# Altium PCB bootleg-alps.PcbDoc (part 3 of 3)
Units mm, origin at the board's own origin, x right, y up, seen from the top; angles counter-clockwise.
Board outline 284.8 x 94.3 mm, 2 copper layers (Component Side, Bottom Layer), stack 1.571 mm thick; 188 components, 146 nets, 677 pads, 266 vias.
Unrouted connection lines stored in the file: 68.
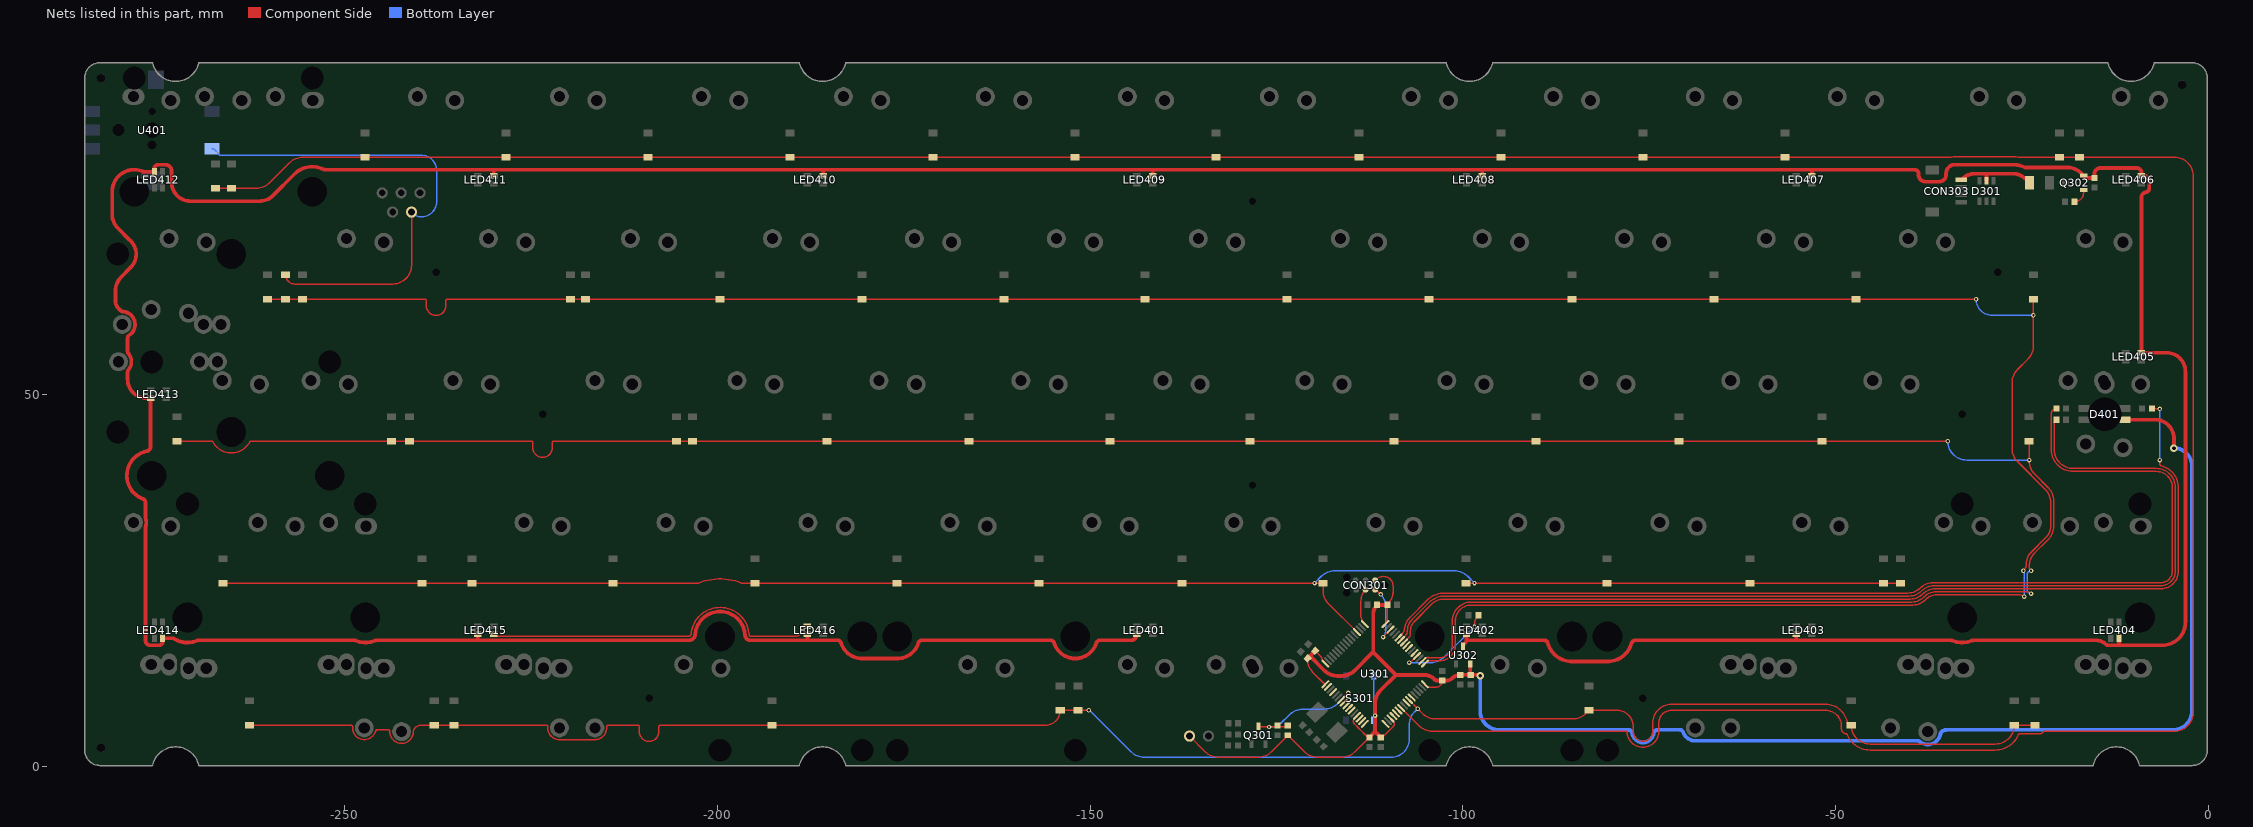
[diagram p3: the nets of this part, all layers, seen from the top]

## Via types
v1: diameter 0.6, hole 0.3, Component Side to Bottom Layer, tented both sides, 264 vias
v2: diameter 1, hole 0.5, Component Side to Bottom Layer, tented both sides, 2 vias

## Nets (pads, with @x,y where several pads share a name; then routed paths per layer and width w, separated by ;. In a path a pad name is that pad's centre, name@x,y a point inside that pad or via, vN(x,y) a via of type N, cw(c..) or ccw(c..) an arc to the next point about the centre after c; other vN are vias at no path point) (continued)
NetLED415_2: LED415.2 LED416.4 | length 48
  Component Side w0.203: LED415.2@-230.018,17.765 -229.77,17.517 -203.848,17.517 ccw(c-203.848,17.828) -203.545,17.755 ccw(c-203.743,17.803) -203.54,17.786 cw(c-199.649,17.47) -203.537,17.828 ; -203.397,18.562 ccw(c-199.649,17.47) -203.537,17.828 ; -197.38,20.646 ccw(c-199.649,17.47) -200.939,21.154 ccw(c-199.649,17.47) -203.46,18.318 ccw(c-199.649,17.47) -203.537,17.828 ; -197.379,20.646 cw(c-199.649,17.47) -196.292,19.461 cw(c-199.649,17.47) -195.755,17.729 ccw(c-195.552,17.743) -195.754,17.722 -195.753,17.714 cw(c-196.799,17.604) -195.752,17.699 ccw(c-195.549,17.717) -195.58,17.517 -189.467,17.517 ccw(c-189.467,18.25) -188.734,18.25 -188.734,18.558 cw(c-188.426,18.558) -188.426,18.865 LED416.4@-187.932,18.865
NetQ302_1: Q302.1 R301.1 | length 2.3
  Component Side w0.203: R301.1@-17.892,75.819 ccw(c-17.892,77.004) -16.707,77.004 Q302.1@-16.707,77.409
NRST: C317.1 Q301.3 R303.2 U301.7 | length 19
  Component Side w0.203: Q301.3@-127.396,5.442 ccw(c-127.288,5.442) -127.288,5.334 v1(-125.984,5.334) -123.652,5.334 ccw(c-123.652,5.527) R303.2@-123.459,5.527 ; U301.7@-116.321,8.946 v1(-115.361,9.906) U301.7@-116.321,8.946
  Bottom Layer w0.203: v1(-125.984,5.334) -125.603,5.334 ccw(c-125.603,7.023) -124.408,5.829 -123.355,6.882 cw(c-121.275,4.8) -121.698,7.713 cw(c-121.275,4.8) -121.275,7.743 -118.576,7.743 ccw(c-118.576,10.283) -116.78,8.487 v1(-115.361,9.906)
  other v1: -115.361,9.906
PA0: U301.14
PA1: U301.15
PA2: U301.16
PA3: U301.17
PA4: U301.20
PA5: U301.21
PA6: U301.22
PA7: D201.2 D202.2 D203.2 D204.2 D205.2 D206.2 D207.2 D208.2 D209.2 D210.2 D211.2 D212.2 D213.2 D214.2 D228.2 U301.23 | length 458
  Component Side w0.203: D228.2@-267.335,77.615 D214.2@-265.176,77.615 -261.892,77.615 ccw(c-261.892,80.155) -260.096,78.359 -257.419,81.036 cw(c-255.623,79.24) -255.623,81.78 D213.2@-247.269,81.78 -37.719,81.78 -34.503,81.78 ccw(c-34.503,81.983) -34.457,81.785 cw(c-33.945,79.592) -33.945,81.844 -26.228,81.844 cw(c-26.228,77.039) -25.461,81.783 ccw(c-25.429,81.983) -25.429,81.78 -18.669,81.78 -4.516,81.78 cw(c-4.516,79.24) -1.976,79.24 -1.976,7.314 cw(c-4.516,7.314) -4.516,4.774 -21.911,4.774 ccw(c-21.912,4.57) -22.073,4.695 cw(c-22.631,5.125) -22.631,4.42 -25.262,4.42 ccw(c-25.263,4.217) -25.451,4.295 cw(c-28.532,5.58) -25.581,4.018 cw(c-28.532,5.58) -27.174,2.53 cw(c-28.532,5.58) -28.532,2.242 -45.347,2.242 cw(c-45.347,5.58) -46.495,2.445 cw(c-45.347,5.58) -47.983,3.532 cw(c-45.347,5.58) -48.432,4.304 ccw(c-48.62,4.226) -48.59,4.428 cw(c-48.489,5.125) -49.194,5.125 -49.194,5.682 ccw(c-51.317,5.439) -49.195,5.694 ccw(c-51.317,5.439) -49.701,6.837 ccw(c-51.317,5.439) -51.317,7.576 -71.978,7.576 ccw(c-71.978,5.842) -73.093,7.169 ccw(c-71.978,5.842) -73.711,5.842 -73.711,4.715 cw(c-75.824,4.715) -73.769,4.224 cw(c-75.824,4.715) -73.769,4.223 ; U301.23@-108.26,7.885 -105.892,5.518 ccw(c-104.096,7.314) -104.096,4.774 -78.137,4.774 cw(c-78.135,4.57) -77.933,4.583 ccw(c-75.824,4.715) -75.824,2.602 ccw(c-75.824,4.715) -73.769,4.223 ; -73.94,3.759 ccw(c-75.824,4.715) -73.769,4.223
PA8: R402.2 U301.41 | length 133.1
  Component Side w0.203: U301.41@-107.906,16.653 -107.301,17.258 ccw(c-107.981,17.938) -107.02,17.938 -107.02,18.252 cw(c-105.3,18.252) -106.517,19.467 ; -106.516,19.468 -104.227,21.757 cw(c-102.431,19.961) -102.431,22.501 -39.937,22.501 ccw(c-39.937,24.848) -38.277,23.189 cw(c-36.617,21.529) -36.617,23.876 -6.35,23.876 ccw(c-6.35,26.239) -3.987,26.239 -3.987,37.487 ccw(c-6.931,37.487) -4.816,39.535 ; v1(-6.477,41.148) -6.477,40.77 ccw(c-5.033,40.77) -6.456,40.527 ccw(c-6.256,40.56) -6.3,40.362 cw(c-6.931,37.487) -4.816,39.535 ; v1(-6.477,48.006) R402.2@-7.196,48.006 ; R402.2@-7.196,48.006 ccw(c-7.536,47.055) R402.2@-7.536,48.065 ccw(c-7.477,48.065) -7.477,48.006 R402.2@-7.196,48.006
  Bottom Layer w0.203: v1(-6.477,41.148) v1(-6.477,48.006)
PA9: R401.1 U301.42 | length 142.8
  Component Side w0.203: U301.42@-108.26,17.007 -107.738,17.529 ; -107.738,17.529 ccw(c-108.499,18.29) -107.423,18.261 ccw(c-107.626,18.267) -107.423,18.263 ccw(c-107.626,18.267) -107.423,18.266 cw(c-105.3,18.252) -107.423,18.29 cw(c-105.3,18.252) -106.802,19.752 cw(c-105.3,18.252) -106.801,19.753 -106.457,20.097 -104.511,22.043 cw(c-102.431,19.961) -102.431,22.904 -40.104,22.904 ccw(c-40.104,25.251) -38.444,23.592 cw(c-36.784,21.932) -38.443,23.593 cw(c-36.784,21.932) -36.784,24.279 -6.35,24.279 ccw(c-6.35,26.239) -4.941,24.877 ccw(c-6.35,26.239) -4.391,26.239 -4.391,37.487 ccw(c-6.931,37.487) -6.931,40.027 -18.093,40.027 cw(c-18.093,42.567) -20.633,42.567 -20.633,46.267 cw(c-20.335,46.267) R401.1@-20.335,46.565
PA10: R403.2 U301.43 | length 144.2
  Component Side w0.203: U301.43@-108.613,17.36 -108.021,17.952 ccw(c-108.492,18.423) -107.826,18.423 ; -107.82,18.423 cw(c-105.3,18.252) -107.088,20.036 cw(c-105.3,18.252) -107.087,20.037 -104.796,22.328 cw(c-102.431,19.961) -102.431,23.307 -40.271,23.307 ccw(c-40.271,25.655) -38.611,23.995 cw(c-36.951,22.335) -38.61,23.996 cw(c-36.951,22.335) -36.951,24.682 -6.35,24.682 ccw(c-6.35,26.239) -5.17,25.224 ccw(c-6.35,26.239) -4.794,26.239 -4.794,37.487 ccw(c-6.931,37.487) -4.834,37.897 ccw(c-6.931,37.487) -6.931,39.624 -18.093,39.624 cw(c-18.093,42.567) -20.395,40.733 cw(c-18.093,42.567) -21.037,42.567 -21.037,47.363 cw(c-20.335,47.363) R403.2@-20.335,48.065
PA13/SWDIO: CON301.2 U301.46 | length 8.4
  Component Side w0.203: CON301.2@-111.76,23.749 cw(c-111.76,23.442) -111.543,23.659 v1(-110.998,23.114) ; v1(-110.696,17.399) U301.46@-109.674,18.421
  Bottom Layer w0.203: v1(-110.998,23.114) cw(c-112.531,21.581) -110.363,21.581 -110.363,18.203 cw(c-111.5,18.203) v1(-110.696,17.399)
PA14/SWCLK: CON301.4 U301.49 | length 4.9
  Component Side w0.203: U301.49@-113.139,19.128 cw(c-111.869,20.398) -113.665,20.398 -113.665,22.216 cw(c-111.497,22.216) CON301.4@-113.03,23.749
PB0: D257.2 D258.2 D259.2 D260.2 D261.2 D262.2 D263.2 D264.2 D265.2 D266.2 U301.26 | length 270.5
  Component Side w0.203: D266.2@-262.763,5.58 -249.365,5.58 cw(c-249.365,3.873) -249.128,5.563 cw(c-249.156,5.362) -248.954,5.345 ccw(c-247.388,5.215) -248.936,4.944 ccw(c-247.388,5.215) -245.873,4.795 cw(c-245.678,4.74) -245.677,4.944 -244.161,4.944 cw(c-244.162,4.74) -243.959,4.738 ccw(c-242.388,4.715) -242.703,3.175 ccw(c-242.388,4.715) -240.817,4.673 cw(c-240.614,4.667) -240.817,4.674 cw(c-240.614,4.667) -240.815,4.694 cw(c-239.806,4.563) -239.806,5.58 D265.2@-238,5.58 D264.2@-235.331,5.58 -222.968,5.58 cw(c-222.967,5.377) -222.765,5.358 ccw(c-221.199,5.215) -222.136,3.953 ccw(c-221.199,5.215) -221.169,3.644 ; -221.232,3.644 ccw(c-221.199,5.215) -221.169,3.644 ; -216.148,3.67 cw(c-216.437,5.215) -216.405,3.644 cw(c-216.437,5.215) -216.406,3.644 cw(c-216.437,5.215) -216.468,3.644 ccw(c-216.472,3.441) -216.473,3.644 -221.164,3.644 ccw(c-221.165,3.441) -221.167,3.644 ccw(c-221.165,3.441) -221.169,3.644 ; -215.707,3.823 cw(c-216.437,5.215) -216.148,3.67 ccw(c-216.437,5.215) -215.284,4.147 ccw(c-216.437,5.215) -214.871,5.083 ccw(c-216.437,5.215) -214.871,5.084 ccw(c-216.437,5.215) -214.872,5.358 cw(c-214.67,5.376) -214.676,5.579 cw(c-214.638,4.572) -214.638,5.58 -210.679,5.58 cw(c-210.679,5.377) -210.475,5.377 -210.475,4.715 ccw(c-209.169,4.715) -207.863,4.715 -207.863,5.377 cw(c-207.659,5.377) -207.659,5.58 D263.2@-192.659,5.58 -156,5.58 ccw(c-156,7.58) D262.2@-154,7.58 D261.2@-151.638,7.58 v1(-150.197,7.58) ; U301.26@-107.199,8.946 v1(-106.045,7.792) -105.412,7.159 ccw(c-103.616,8.955) -103.616,6.415 -85.276,6.415 ccw(c-85.276,8.955) -83.479,7.159 D260.2@-83.058,7.58 -79.334,7.58 cw(c-79.334,5.377) -77.13,5.377 -77.13,4.715 ccw(c-75.824,4.715) -74.518,4.715 -74.518,5.842 cw(c-71.978,5.842) -71.978,8.382 -51.317,8.382 cw(c-51.317,5.439) -49.386,7.66 ; -49.385,7.66 cw(c-51.317,5.439) -48.395,5.793 ccw(c-48.193,5.818) -48.239,5.62 ccw(c-47.879,7.231) D259.2@-47.879,5.58 ccw(c-45.347,5.58) -45.347,3.048 -28.532,3.048 ccw(c-28.532,5.58) D258.2@-26,5.58 D257.2@-23.241,5.58
  Bottom Layer w0.203: v1@-149.987,7.493 -144.508,2.014 ccw(c-142.712,3.81) -142.712,1.27 -124.968,1.27 -119.634,1.27 -109.601,1.27 ccw(c-109.601,3.683) -107.188,3.683 -107.188,5.597 cw(c-104.648,5.597) -106.444,7.393 v1(-106.045,7.792)
PB1: U301.27
PB12: D215.2 D216.2 D217.2 D218.2 D219.2 D220.2 D221.2 D222.2 D223.2 D224.2 D225.2 D226.2 D227.2 D242.2 D268.2 U301.33 | length 371.9
  Component Side w0.203: D242.2@-260.35,62.73 -239.26,62.73 cw(c-239.26,62.527) -239.056,62.527 -239.056,61.865 ccw(c-237.75,61.865) -236.444,61.865 -236.444,62.527 cw(c-236.24,62.527) -236.24,62.73 D226.2@-219.71,62.73 D225.2@-217.678,62.73 D224.2@-199.644,62.73 D223.2@-180.594,62.73 D222.2@-161.544,62.73 D221.2@-142.621,62.73 D220.2@-123.571,62.73 D219.2@-104.521,62.73 D218.2@-85.344,62.73 D217.2@-66.294,62.73 D216.2@-47.244,62.73 v1(-31.123,62.73) ; U301.33@-105.078,13.825 -104.689,14.214 -103.124,14.214 ccw(c-103.124,16.351) -101.694,14.762 ccw(c-101.83,14.914) -101.683,14.773 cw(c-101.174,14.286) -101.626,14.827 ccw(c-103.124,16.351) -101.429,15.05 ccw(c-103.124,16.351) -100.987,16.351 -100.987,19.558 cw(c-98.85,19.558) -100.514,20.899 cw(c-98.85,19.558) -98.85,21.695 -39.603,21.695 ccw(c-39.603,24.042) -37.943,22.382 cw(c-36.283,20.723) -37.942,22.383 ; -37.942,22.383 cw(c-36.285,20.726) -37.82,22.497 cw(c-37.687,22.343) -37.818,22.499 ccw(c-38.206,22.964) -37.813,22.503 ccw(c-38.206,22.964) -37.81,22.505 ; -37.81,22.506 ccw(c-38.074,22.81) -37.806,22.509 cw(c-37.671,22.357) -37.802,22.512 cw(c-37.66,22.367) -37.799,22.515 ccw(c-38.074,22.81) -37.787,22.526 cw(c-36.474,21.21) -37.77,22.543 cw(c-36.456,21.166) -36.456,23.07 -25.305,23.07 cw(c-25.305,22.278) -24.746,22.838 v1(-24.66,22.838) ; v1(-24.765,26.289) ccw(c-25.631,27.155) -24.406,27.155 cw(c-22.108,27.155) -23.733,28.78 -21.73,30.783 ccw(c-23.241,32.294) -21.104,32.294 -21.104,35.419 ccw(c-23.644,35.419) -21.848,37.215 -25.545,40.912 cw(c-23.749,42.708) -26.289,42.708 -26.289,51.526 cw(c-23.749,51.526) -25.545,53.322 -24.175,54.692 ccw(c-25.971,56.488) -23.431,56.488 D215.2@-23.431,62.73
  Bottom Layer w0.203: v1(-31.123,62.73) ccw(c-28.972,62.73) -28.972,60.579 v1@-23.495,60.579 ; v1(-24.765,26.289) -24.765,26.182 -24.66,26.077 v1(-24.66,22.838)
  other v1: -23.431,60.579
PB13: D229.2 D230.2 D231.2 D232.2 D233.2 D234.2 D235.2 D236.2 D237.2 D238.2 D239.2 D240.2 D241.2 D256.2 U301.34 | length 365.5
  Component Side w0.203: D256.2@-272.542,43.68 -267.867,43.68 cw(c-267.866,43.477) -267.688,43.574 ccw(c-265.225,44.907) -262.762,43.574 cw(c-262.584,43.477) -262.583,43.68 -224.972,43.68 cw(c-224.972,43.477) -224.768,43.477 -224.768,42.815 ccw(c-223.462,42.815) -222.156,42.815 -222.156,43.477 cw(c-221.952,43.477) -221.952,43.68 D237.2@-185.293,43.68 D236.2@-166.243,43.68 D235.2@-147.32,43.68 D234.2@-128.524,43.68 D233.2@-109.22,43.68 D232.2@-90.17,43.68 D231.2@-70.993,43.68 D230.2@-51.816,43.68 v1@-34.925,43.68 ; U301.34@-105.431,14.178 ccw(c-105.448,14.381) -105.4,14.183 ccw(c-105.448,14.381) -105.304,14.238 -105.009,14.532 cw(c-104.689,14.214) -104.519,14.632 ccw(c-104.442,14.82) -104.442,14.617 -104.272,14.617 -103.124,14.617 ccw(c-103.124,16.351) -102.67,14.677 ccw(c-103.124,16.351) -101.975,15.052 ccw(c-102.109,15.205) -101.965,15.062 cw(c-101.174,14.286) -101.899,15.124 ccw(c-103.124,16.351) -101.749,15.295 ccw(c-103.124,16.351) -101.39,16.351 -101.39,19.558 cw(c-98.85,19.558) -98.85,22.098 -39.77,22.098 ccw(c-39.77,24.445) -38.11,22.785 ccw(c-38.206,22.964) -38.074,22.81 cw(c-36.474,21.21) -36.474,23.473 -24.309,23.473 cw(c-24.309,22.681) v1(-23.749,23.241) ; D229.2@-24.003,43.68 -24.003,41.057 ccw(c-21.463,41.057) -23.259,39.261 -21.445,37.447 cw(c-23.241,35.651) -20.701,35.651 -20.701,32.294 cw(c-23.241,32.294) -21.445,30.498 -23.269,28.674 ccw(c-21.498,26.902) -24.003,26.902 ccw(c-23.136,26.902) v1(-23.749,26.289)
  Bottom Layer w0.203: v1(-34.925,43.688) ccw(c-32.385,43.688) -32.385,41.148 v1(-24.003,41.148) ; v1(-23.749,23.241) cw(c-23.749,23.749) -24.257,23.749 -24.257,25.781 cw(c-23.749,25.781) v1(-23.749,26.289)
PB15: R306.2 U301.36 | length 13.7
  Component Side w0.203: v1(-107.188,13.97) -107.112,14.046 -106.978,14.046 U301.36@-106.138,14.886 ; v1(-98.425,18.796) -98.425,19.057 cw(c-96.639,19.057) R306.2@-97.902,20.32
  Bottom Layer w0.203: v1(-107.188,13.97) -104.303,13.97 ccw(c-104.303,16.51) -102.507,14.714 v1(-98.425,18.796)
PC0: U301.8
PC1: U301.9
PC2: U301.10
PC3: U301.11
PC5: U301.25
PC6: U301.37
PC8: U301.39
PC9: U301.40
PC11: D243.2 D244.2 D245.2 D246.2 D247.2 D248.2 D249.2 D250.2 D251.2 D252.2 D253.2 D254.2 D255.2 D267.2 U301.52 | length 237
  Component Side w0.203: D255.2@-266.327,24.63 D254.2@-232.918,24.63 D253.2@-213.995,24.63 -202.617,24.63 ccw(c-202.617,24.833) -202.541,24.645 cw(c-199.649,17.47) -196.758,24.645 ccw(c-196.682,24.833) -196.682,24.63 D252.2@-194.945,24.63 D251.2@-175.895,24.63 D250.2@-156.845,24.63 D249.2@-137.668,24.63 D248.2@-118.745,24.63 -118.745,23.665 ccw(c-116.205,23.665) -118.001,21.869 U301.52@-114.2,18.067 ; D247.2@-99.568,24.63 D246.2@-80.645,24.63 D245.2@-61.468,24.63 D243.2@-43.561,24.63 D244.2@-41.275,24.63
  Bottom Layer w0.203: v1(-119.888,24.638) -118.981,25.545 cw(c-117.185,23.749) -117.185,26.289 -101.128,26.289 cw(c-101.128,23.749) -99.332,25.545 v1(-98.425,24.638)
PC13: U301.2
PC15: U301.4
RAW: CON303.1 D301.5 F301.2 | length 10.8
  Component Side w0.508: CON303.1@-33.125,78.75 -33.04,78.835 cw(c-31.244,77.039) -31.244,79.579 -29.591,79.579 ; D301.5@-29.718,78.625 -29.718,79.452 cw(c-29.591,79.452) -29.591,79.579 ; F301.2@-23.956,78.359 -24.432,78.835 ccw(c-26.228,77.039) -26.228,79.579 -29.591,79.579
ROT_SW_A1: CON403.1 D268.1 U401.1 | length 67.1
  Component Side w0.203: D268.1@-257.937,66 ccw(c-256.707,66) -256.707,64.77 -243.586,64.77 ccw(c-243.586,67.31) -241.046,67.31 CON403.1@-241.046,74.422
  Bottom Layer w0.203: U401.1@-267.844,82.915 -267.594,82.915 -266.946,82.267 -266.946,82.183 -266.827,82.064 -239.776,82.064 cw(c-239.776,79.927) -237.872,80.896 cw(c-239.776,79.927) -237.639,79.927 -237.639,75.91 cw(c-239.776,75.91) -238.146,74.528 cw(c-239.776,75.91) -239.656,73.777 cw(c-239.656,75.577) CON403.1@-240.928,74.304 ; CON403.1@-241.046,74.422 CON403.1@-240.928,74.304 ; CON403.1@-240.733,74.109 CON403.1@-240.928,74.304
VCC3V3: C301.2 C302.2 C303.2 C304.2 C305.2 C306.2 C311.2 C312.2 CON301.1 CON302.2 D401.4 R302.1 R303.1 S301.1 U301.1 U301.13 U301.19 U301.32 U301.48 U301.64 U302.2 | length 260.5
  Component Side w0.203: CON302.2@-136.667,4.115 -134.566,2.014 ccw(c-132.77,3.81) -132.77,1.27 -127.468,1.27 ccw(c-127.468,3.81) -125.672,2.014 R303.1@-123.459,4.227 -121.246,2.014 ccw(c-119.45,3.81) -119.45,1.27 -116.256,1.27 ccw(c-116.256,3.81) -114.46,2.014 C301.2@-112.522,3.952 cw(c-112.522,4.477) -112.894,4.106 -113.018,4.23 -113.802,5.015 ccw(c-113.947,4.872) -113.817,5.028 cw(c-113.528,5.375) -113.875,5.086 ccw(c-114.031,4.956) -113.888,5.1 -114.022,5.234 -114.156,5.368 ; C303.2@-120.825,14.526 -120.825,14.414 ccw(c-118.285,14.414) -120.523,13.211 ccw(c-120.344,13.307) -120.492,13.169 cw(c-122.013,11.755) -120.181,12.733 ccw(c-120.002,12.828) -120.152,12.691 ccw(c-118.285,14.414) -120.081,12.618 -118.594,11.13 ccw(c-118.442,11.282) U301.1@-118.442,11.067 ; C304.2@-119.809,15.542 -119.468,15.201 -118.989,14.722 cw(c-119.132,14.578) -118.929,14.575 ccw(c-118.478,14.567) -118.797,14.248 -118.497,13.948 cw(c-118.64,13.803) U301.64@-118.442,13.851 ; -114.228,5.44 ccw(c-113.881,5.728) -114.17,5.381 cw(c-114.3,5.225) -114.157,5.369 ; -114.229,5.44 ccw(c-114.385,5.31) -114.24,5.453 ccw(c-114.385,5.31) -114.241,5.454 -114.517,5.73 cw(c-114.235,6.082) -114.554,6.401 -114.259,6.697 ccw(c-114.402,6.841) U301.13@-114.2,6.825 ; CON301.1@-111.76,25.019 -111.701,25.078 cw(c-110.617,23.994) -110.617,25.527 cw(c-110.617,24.257) -109.347,24.257 -109.347,23.546 cw(c-111.887,23.546) -110.091,21.75 R302.1@-110.124,21.717 -110.124,19.749 cw(c-111.002,19.749) U301.48@-110.381,19.128 ; C306.2@-110.998,3.952 ccw(c-110.998,4.482) -110.623,4.107 -110.492,4.238 -109.874,4.856 -109.705,5.026 ; -109.704,5.026 cw(c-109.561,4.883) -109.695,5.035 ccw(c-109.992,5.375) -109.653,5.077 cw(c-109.5,4.943) -109.643,5.087 ; U301.19@-109.674,6.471 ccw(c-109.471,6.487) -109.615,6.344 -109.319,6.048 cw(c-109.639,5.728) -109.295,5.435 cw(c-109.639,5.728) -109.341,5.389 ccw(c-109.207,5.236) -109.351,5.38 -109.497,5.233 -109.643,5.087 ; U301.32@-105.078,11.067 ccw(c-104.875,11.084) -105.019,10.94 -104.806,10.727 ccw(c-104.662,10.871) -104.679,10.668 -103.617,10.668 ccw(c-103.617,11.542) C305.2@-102.743,11.542
  Component Side w0.508: C304.2@-119.809,15.542 -120.508,14.844 -118.6,12.936 ccw(c-116.804,14.732) -116.804,12.192 -116.257,12.192 ccw(c-116.257,14.732) -114.461,12.936 -112.022,15.375 ; C301.2@-112.351,4.123 -111.76,4.714 ; C306.2@-110.998,3.952 -111.023,3.952 -111.169,4.098 -111.169,4.123 -111.76,4.714 ; R302.1@-110.124,21.717 C312.2@-111.491,21.717 ccw(c-110.209,20.435) -111.92,21.034 ccw(c-110.209,20.435) -112.022,20.435 -112.022,15.375 ; -101.389,11.895 cw(c-102.242,12.749) -102.052,11.557 cw(c-102.242,12.749) -102.242,11.542 C305.2@-102.743,11.542 -103.245,11.542 cw(c-103.245,12.46) -103.894,11.811 ccw(c-105.121,10.585) -105.121,12.319 -108.966,12.319 ; -101.388,11.896 cw(c-100.33,10.837) -100.948,12.201 cw(c-100.33,10.837) C302.2@-100.33,12.334 C311.2@-98.933,12.334 ; U302.2@-98.999,13.786 -98.999,12.4 C311.2@-98.933,12.334 ; v2(-97.663,12.192) ccw(c-98.006,11.849) -98.006,12.334 C311.2@-98.933,12.334 ; D401.4@-11.125,46.565 -7.112,46.565 cw(c-7.112,44.025) -4.572,44.025 v2(-4.572,42.75) ; -112.022,15.375 -108.966,12.319 ; -111.76,4.714 v1(-111.76,6.858) -111.76,8.473 cw(c-109.22,8.473) -111.016,10.269 -108.966,12.319
  Bottom Layer w0.203: S301.1@-111.917,6.215 S301.1@-111.917,12.215
  Bottom Layer w0.508: v2(-97.663,12.192) -97.663,7.493 ccw(c-95.123,7.493) -95.123,4.953 -77.774,4.953 cw(c-77.772,4.445) -77.269,4.515 ccw(c-75.824,4.715) -74.379,4.515 cw(c-73.876,4.445) -73.874,4.953 -70.896,4.953 cw(c-70.894,4.445) -70.893,4.953 cw(c-70.894,4.445) -70.418,4.62 ccw(c-68.799,5.215) -68.773,3.491 ; -68.833,3.491 ccw(c-68.799,5.215) -68.773,3.491 ; v2(-4.572,42.75) cw(c-4.572,40.337) -2.159,40.337 -2.159,7.493 cw(c-4.699,7.493) -4.699,4.953 -34.935,4.953 ccw(c-34.935,3.386) -35.622,4.795 ccw(c-35.4,4.337) -35.901,4.423 cw(c-37.6,4.715) -36.502,3.386 cw(c-37.6,4.715) -38.688,3.377 ccw(c-39.008,2.983) -39.007,3.491 -42.569,3.491 ccw(c-42.57,2.983) -42.577,3.491 cw(c-42.6,5.215) -42.624,3.491 ccw(c-42.63,2.983) -42.629,3.491 -64.005,3.491 ccw(c-64.007,2.983) -64.012,3.491 ccw(c-64.007,2.983) -64.014,3.491 cw(c-64.037,5.215) -64.064,3.491 ccw(c-64.071,2.983) -64.065,3.491 ccw(c-64.071,2.983) -64.071,3.491 -68.765,3.491 ccw(c-68.765,2.983) -68.771,3.491 ccw(c-68.765,2.983) -68.773,3.491
VCC5V: C310.2 LED401.1 LED402.1 LED403.1 LED404.1 LED405.1 LED406.1 LED407.1 LED408.1 LED409.1 LED410.1 LED411.1 LED412.1 LED413.1 LED414.1 LED415.1 LED416.1 Q302.2 U302.3 | length 696.5
  Component Side w0.5: -272.429,16.925 cw(c-271.118,20.01) -272.431,16.926 cw(c-271.118,20.01) -272.904,17.173 ccw(c-273.17,16.75) -273.164,17.25 LED414.1@-274.449,17.25 -274.449,16.775 cw(c-274.924,16.775) -274.924,16.3 -276.098,16.3 cw(c-276.098,16.954) -276.752,16.954 -276.752,24.675 -276.752,32.04 cw(c-276.252,32.04) -276.724,32.203 ccw(c-278.35,32.765) -276.724,33.327 cw(c-276.252,33.49) -276.752,33.49 -276.752,35.456 ccw(c-277.252,35.457) -277.075,35.925 cw(c-275.888,39.06) -277.437,42.033 cw(c-275.888,39.06) -276.688,42.315 cw(c-275.888,39.06) -276.687,42.315 cw(c-275.888,39.06) -276.515,42.353 ccw(c-276.608,42.844) -276.29,42.459 ccw(c-276.688,42.94) -276.063,42.94 LED413.1@-276.063,49.45 -276.606,49.45 cw(c-276.606,51.99) -279.146,51.99 -279.146,52.936 cw(c-278.646,52.936) -279.032,53.253 ccw(c-280.361,54.345) -279.032,55.437 cw(c-278.646,55.754) -279.146,55.754 -279.146,57.487 cw(c-278.646,57.487) -278.92,57.906 ccw(c-279.861,59.345) -279.061,60.868 ccw(c-279.861,59.345) -279.748,61.061 cw(c-279.715,61.56) -279.988,61.141 cw(c-279.061,62.575) -280.768,62.575 -280.768,63.874 cw(c-278.228,63.874) -280.024,65.67 -278.681,67.062 ccw(c-280.465,68.783) -278.032,69.257 ccw(c-280.465,68.783) -278.873,70.683 -280.461,72.271 cw(c-278.665,74.067) -281.205,74.067 -281.205,77.1 ccw(c-281.705,77.101) -281.205,77.108 ccw(c-281.705,77.101) -281.205,77.11 cw(c-278.257,77.16) -277.066,79.858 ccw(c-276.864,80.315) -276.864,79.815 LED412.1@-275.548,79.815 -275.548,80.299 cw(c-275.082,80.299) -275.082,80.765 -274.066,80.765 cw(c-274.066,79.944) -273.245,79.944 -273.245,78.43 ccw(c-270.705,78.43) -270.705,75.89 -261.443,75.89 ccw(c-261.443,78.43) -259.647,76.634 -256.781,79.5 ccw(c-257.134,79.854) -256.778,79.504 ccw(c-257.134,79.854) -256.777,79.505 cw(c-254.381,77.16) -255.923,80.136 cw(c-254.381,77.16) -255.922,80.137 cw(c-254.381,77.16) -252.88,80.157 ; -272.429,16.925 ccw(c-271.118,20.01) -272.067,16.795 -272.063,16.794 ccw(c-271.118,20.01) -269.807,16.925 cw(c-269.611,16.465) -269.609,16.965 -248.751,16.965 cw(c-248.749,16.465) -248.553,16.925 ccw(c-247.242,20.01) -245.931,16.925 cw(c-245.735,16.465) -245.733,16.965 -232.028,16.965 ; -252.222,80.1 -251.714,80.1 -231.013,80.1 ; -252.222,80.104 -252.656,80.104 cw(c-252.656,80.604) -252.873,80.154 cw(c-252.656,80.604) -252.878,80.156 cw(c-252.656,80.604) -252.88,80.157 ; LED415.1@-232.148,17.765 -232.148,17.014 ccw(c-232.028,17.134) -232.028,16.965 ; LED411.1@-230.018,79.3 -230.018,80.1 ; -196.358,18.104 cw(c-199.649,17.47) -196.305,17.69 ; -196.358,18.104 ccw(c-199.649,17.47) -198.293,20.535 ccw(c-199.649,17.47) -202.201,19.643 ccw(c-199.649,17.47) -202.903,18.276 ccw(c-199.649,17.47) -202.99,17.745 cw(c-203.743,17.803) -202.99,17.744 cw(c-203.743,17.803) -202.991,17.74 cw(c-203.743,17.803) -203.01,17.623 cw(c-203.848,17.828) -203.848,16.965 -232.028,16.965 ; -196.305,17.689 ccw(c-195.552,17.743) -196.303,17.67 ccw(c-195.552,17.743) -196.303,17.667 -196.302,17.657 cw(c-196.799,17.605) -196.301,17.65 ccw(c-195.549,17.717) -196.301,17.647 ccw(c-195.549,17.717) -195.664,16.971 ccw(c-195.58,17.517) -195.58,16.965 -187.902,16.965 ; LED416.1@-187.932,17.765 -187.932,17.036 ccw(c-187.831,17.036) -187.902,16.965 ; LED410.1@-185.802,79.3 -185.802,80.081 ; LED401.1@-143.715,17.765 cw(c-144.515,17.765) -144.515,16.965 -148.692,16.965 ccw(c-148.694,16.465) -149.172,16.611 cw(c-151.993,17.47) -154.814,16.611 ccw(c-155.292,16.465) -155.294,16.965 -172.568,16.965 ccw(c-172.57,16.465) -173.048,16.611 cw(c-175.869,17.47) -176.007,14.524 ccw(c-176.053,13.622) -176.09,14.525 cw(c-176.129,15.431) -176.129,14.524 -180.45,14.524 ccw(c-180.452,14.024) -180.472,14.524 cw(c-180.589,17.47) -183.41,16.611 ccw(c-183.889,16.465) -183.89,16.965 -186.563,16.965 -187.902,16.965 ; LED409.1@-141.585,79.3 -141.585,80.081 ; U302.3@-99.949,16.186 -99.949,16.411 -99.924,16.436 U302.3@-99.791,16.436 ; U302.3@-99.79,16.436 ccw(c-100.498,17.143) -99.498,17.143 ; LED402.1@-99.498,17.765 -99.498,17.143 ; LED408.1@-97.368,79.3 -97.368,80.081 ; LED403.1@-55.282,17.765 cw(c-55.282,17.728) -55.245,17.728 -55.245,16.965 ; LED407.1@-53.152,79.3 -53.152,80.081 ; -35.141,79.592 cw(c-33.945,79.592) -33.945,80.788 -26.228,80.788 cw(c-26.228,77.039) -24.669,80.448 ccw(c-24.461,80.903) -24.461,80.403 -21.971,80.403 -18.853,80.403 cw(c-18.853,77.863) -17.057,79.659 Q302.2@-16.707,79.309 ccw(c-16.407,79.309) -16.407,79.009 C310.2@-15.24,79.009 -15.24,79.544 cw(c-14.451,79.544) -14.451,80.333 -9.568,80.333 cw(c-9.568,79.7) -8.935,79.7 LED406.1@-8.935,79.3 -8.584,79.3 cw(c-8.584,78.59) -7.874,78.59 -7.874,77.665 cw(c-8.493,77.665) -8.267,77.089 ; -13.718,16.431 ccw(c-13.4,16.75) -13.4,16.3 -11.95,16.3 ; -13.718,16.432 ccw(c-15.006,15.143) -15.006,16.965 -28.575,16.965 -31.487,16.965 ccw(c-31.487,16.465) -31.682,16.925 cw(c-32.994,20.01) -34.306,16.925 ccw(c-34.501,16.465) -34.501,16.965 -55.245,16.965 ; LED404.1@-11.95,17.25 -11.95,16.3 ; -252.88,80.157 ccw(c-254.381,77.16) -253.735,80.449 cw(c-254.381,77.16) -252.88,80.157 ; -99.498,17.143 -99.498,16.965 -89.078,16.965 cw(c-89.078,16.42) -88.955,16.951 cw(c-89.068,16.464) -88.586,16.596 ccw(c-85.349,17.47) -87.893,15.286 ccw(c-85.349,17.47) -85.194,14.122 cw(c-85.171,13.622) -85.169,14.122 -80.77,14.122 cw(c-80.768,13.622) -80.745,14.122 ccw(c-80.59,17.47) -80.434,14.122 ccw(c-80.59,17.47) -80.432,14.122 ccw(c-80.59,17.47) -78.976,14.532 ccw(c-80.59,17.47) -78.146,15.175 ccw(c-80.59,17.47) -77.361,16.568 cw(c-76.88,16.433) -77.361,16.57 cw(c-76.88,16.433) -77.169,16.841 cw(c-76.781,16.296) -76.781,16.965 -55.245,16.965 ; -11.95,16.3 -6.124,16.3 ccw(c-6.124,19.392) -4.048,17.101 ccw(c-6.124,19.392) -3.033,19.392 -3.033,53.01 ccw(c-5.573,53.01) -5.573,55.55 LED405.1@-8.935,55.55 -8.935,76.409 cw(c-8.255,76.409) -8.493,77.046 ; -8.493,77.046 cw(c-8.255,76.409) -8.267,77.089 ; -8.493,77.046 ccw(c-8.493,77.665) -8.267,77.089
  Component Side w0.508: -252.222,80.104 -46.736,80.104 -46.732,80.1 -39.367,80.1 cw(c-39.367,79.592) -38.859,79.592 -38.859,79.45 ccw(c-37.9,79.45) -37.9,78.491 -36.097,78.491 ccw(c-36.1,79.45) -35.141,79.45 -35.141,79.592
pads on no net: CON301.0 CON301.3 CON301.6 D301.1 D301.6 D401. LED401.2 S201. S202. S203. S204. S205. S206. S207. S208. S209. S210. S211. S212. S213. S214. S215. S216. S217. S218. S219. S220. S221. S222. S223. S224. S225. S226. S227. S228. S229. S230. S231. S232. S233. S234. S235. S236. S237. S238. S239. S240. S241. S242. S243. S244. S245. S246. S247. S248. S249. S250. S251. S252. S253. S254. S255. S256. S257. S258. S259. S260. S261. S262. S263. S264. S265. S266. S267. U301.35 U401.
copper on no net: | length 0.2
  Component Side w0.203: -141.585,17.517 -141.585,17.765

## Polygon pours and split planes (outlines as drawn)
GND on Bottom Layer "Component Side-No Net" (hatched 45Degree grid 1.27 track 0.203, remove dead copper, pour order 0): -0.635,93.995 -0.635,0.65 -284.48,0.65 -284.48,93.995
GND on Component Side "Component Side-No Net" (hatched 45Degree grid 1.27 track 0.203, remove dead copper, pour order 1): -0.635,93.995 -0.635,0.65 -284.48,0.65 -284.48,93.995

## Other copper
Component Side:
  pour cut-out: -282.851,0.665 ccw(c-282.85,2.215) -282.85,0.665 -276.189,0.665 cw(c-272.7,-0.52) -269.211,0.665 -189.389,0.665 cw(c-185.9,-0.52) -182.411,0.665 -102.589,0.665 cw(c-99.1,-0.52) -95.511,0.317 cw(c-95.95,0.215) -95.5,0.215 cw(c-95.95,0.215) -96.389,0.113 ccw(c-99.1,-0.52) -101.811,0.115 ccw(c-99.1,-0.52) -101.811,0.113 -101.811,0.115 cw(c-102.25,0.215) -102.25,-0.235 -182.75,-0.235 cw(c-182.75,0.215) -183.189,0.114 cw(c-185.9,-0.52) -183.189,0.113 -183.189,0.114 ccw(c-185.9,-0.52) -188.611,0.113 cw(c-189.05,0.215) -189.05,-0.235 -269.55,-0.235 cw(c-269.55,0.215) -269.989,0.113 ccw(c-272.7,-0.52) -275.411,0.114 ccw(c-272.7,-0.52) -275.411,0.113 -275.411,0.114 cw(c-275.85,0.215) -275.85,-0.235 -282.85,-0.235 cw(c-282.85,2.215) -285.3,2.215 -285.3,40.767 cw(c-284.85,40.767) -285.3,40.769 -285.3,92.415 cw(c-282.85,92.415) -282.85,94.865 cw(c-282.85,94.415) -282.848,94.865 -275.85,94.865 cw(c-275.85,94.415) -275.411,94.516 ccw(c-272.7,95.149) -269.988,94.517 cw(c-269.55,94.415) -269.55,94.865 -189.05,94.865 cw(c-189.05,94.415) -188.611,94.517 ccw(c-185.9,95.149) -183.189,94.516 ccw(c-185.9,95.149) -183.189,94.517 -183.189,94.516 cw(c-182.75,94.415) -182.75,94.865 -102.25,94.865 cw(c-102.25,94.415) -101.811,94.516 cw(c-99.1,95.149) -101.811,94.517 -101.811,94.516 ccw(c-99.1,95.149) -96.389,94.517 cw(c-95.95,94.415) -95.95,94.865 -13.477,94.865 cw(c-13.477,94.415) -13.038,94.516 cw(c-10.327,95.149) -13.038,94.517 -13.038,94.516 ccw(c-10.327,95.149) -7.616,94.517 cw(c-7.177,94.415) -7.164,94.865 cw(c-7.15,94.415) -7.15,94.865 -2.15,94.865 cw(c-2.15,92.415) 0.3,92.415 0.3,39.065 cw(c-0.15,39.065) 0.3,39.062 0.3,2.215 cw(c-2.15,2.215) -2.15,-0.235 -9.15,-0.235 cw(c-9.15,0.215) -9.589,0.113 ccw(c-12.3,-0.52) -15.011,0.113 cw(c-15.45,0.215) -15.889,0.317 cw(c-12.3,-0.52) -8.811,0.665 -2.15,0.665 ccw(c-2.15,2.215) -0.6,2.215 -0.6,39.37 cw(c-0.15,39.37) -0.6,39.373 -0.6,92.415 ccw(c-2.15,92.415) -2.15,93.965 -6.838,93.965 cw(c-10.327,95.149) -13.816,93.965 -95.611,93.965 cw(c-99.1,95.149) -102.589,93.965 -182.411,93.965 cw(c-185.9,95.149) -189.389,93.965 -269.211,93.965 cw(c-272.7,95.149) -276.189,93.965 -282.85,93.965 cw(c-282.85,94.415) -282.851,93.965 cw(c-282.85,92.415) -282.85,93.965 -282.851,93.965 ccw(c-282.85,92.415) -284.4,92.416 cw(c-284.85,92.415) -284.4,92.415 -284.4,39.065 cw(c-284.85,39.065) -284.4,39.063 -284.4,2.215 ccw(c-282.85,2.215)
  pour cut-out: -95.95,-0.235 cw(c-95.95,0.215) -95.95,0.665 -15.45,0.665 cw(c-15.45,0.215) -15,0.215 cw(c-15.45,0.215) -15.45,-0.235
  pour cut-out: -13.837,94.342 ccw(c-10.3,95.149) -6.754,94.388 ccw(c-6.878,94.415) -6.751,94.415 ccw(c-6.878,94.415) -6.878,94.542 -13.668,94.542 ccw(c-13.668,94.415) -13.777,94.48 ccw(c-13.713,94.37)
  pour cut-out: -276.23,94.342 ccw(c-272.694,95.149) -269.147,94.388 ccw(c-269.272,94.415) -269.144,94.415 ccw(c-269.272,94.415) -269.272,94.542 -276.061,94.542 ccw(c-276.061,94.415) -276.171,94.48 ccw(c-276.106,94.37)
  pour cut-out: -189.43,94.342 ccw(c-185.894,95.149) -182.347,94.388 ccw(c-182.472,94.415) -182.344,94.415 ccw(c-182.472,94.415) -182.472,94.542 -189.261,94.542 ccw(c-189.261,94.415) -189.371,94.48 ccw(c-189.306,94.37)
  pour cut-out: -102.63,94.342 ccw(c-99.094,95.149) -95.547,94.388 ccw(c-95.672,94.415) -95.544,94.415 ccw(c-95.672,94.415) -95.672,94.542 -102.461,94.542 ccw(c-102.461,94.415) -102.571,94.48 ccw(c-102.506,94.37)
  pour cut-out: -269.158,0.288 ccw(c-272.694,-0.519) -276.241,0.242 ccw(c-276.116,0.215) -276.244,0.215 ccw(c-276.116,0.215) -276.116,0.088 -269.327,0.088 ccw(c-269.327,0.215) -269.217,0.15 ccw(c-269.282,0.26)
  pour cut-out: -182.358,0.288 ccw(c-185.894,-0.519) -189.441,0.242 ccw(c-189.316,0.215) -189.444,0.215 ccw(c-189.316,0.215) -189.316,0.088 -182.527,0.088 ccw(c-182.527,0.215) -182.417,0.15 ccw(c-182.482,0.26)
  pour cut-out: -8.758,0.288 ccw(c-12.294,-0.519) -15.841,0.242 ccw(c-15.716,0.215) -15.844,0.215 ccw(c-15.716,0.215) -15.716,0.088 -8.927,0.088 ccw(c-8.927,0.215) -8.817,0.15 ccw(c-8.882,0.26)
  pour cut-out: -95.558,0.288 ccw(c-99.094,-0.519) -102.641,0.242 ccw(c-102.516,0.215) -102.644,0.215 ccw(c-102.516,0.215) -102.516,0.088 -95.727,0.088 ccw(c-95.727,0.215) -95.617,0.15 ccw(c-95.682,0.26)
  pour cut-out: -13.83,94.342 ccw(c-10.294,95.149) -6.747,94.388 ccw(c-6.872,94.415) -6.744,94.415 ccw(c-6.872,94.415) -6.872,94.542 -13.661,94.542 ccw(c-13.661,94.415) -13.771,94.48 ccw(c-13.706,94.37)
  region net GND: 1746 vertices and 2 holes, not listed, extent -181.207,6.629 -175.295,12.769
Bottom Layer:
  pour cut-out: -282.851,0.665 ccw(c-282.85,2.215) -282.85,0.665 -276.189,0.665 cw(c-272.7,-0.52) -269.211,0.665 -189.389,0.665 cw(c-185.9,-0.52) -182.411,0.665 -102.589,0.665 cw(c-99.1,-0.52) -95.511,0.317 cw(c-95.95,0.215) -95.5,0.215 cw(c-95.95,0.215) -96.389,0.113 ccw(c-99.1,-0.52) -101.811,0.115 ccw(c-99.1,-0.52) -101.811,0.113 -101.811,0.115 cw(c-102.25,0.215) -102.25,-0.235 -182.75,-0.235 cw(c-182.75,0.215) -183.189,0.114 cw(c-185.9,-0.52) -183.189,0.113 -183.189,0.114 ccw(c-185.9,-0.52) -188.611,0.113 cw(c-189.05,0.215) -189.05,-0.235 -269.55,-0.235 cw(c-269.55,0.215) -269.989,0.113 ccw(c-272.7,-0.52) -275.411,0.114 ccw(c-272.7,-0.52) -275.411,0.113 -275.411,0.114 cw(c-275.85,0.215) -275.85,-0.235 -282.85,-0.235 cw(c-282.85,2.215) -285.3,2.215 -285.3,40.767 cw(c-284.85,40.767) -285.3,40.769 -285.3,92.415 cw(c-282.85,92.415) -282.85,94.865 cw(c-282.85,94.415) -282.848,94.865 -275.85,94.865 cw(c-275.85,94.415) -275.411,94.516 ccw(c-272.7,95.149) -269.988,94.517 cw(c-269.55,94.415) -269.55,94.865 -189.05,94.865 cw(c-189.05,94.415) -188.611,94.517 ccw(c-185.9,95.149) -183.189,94.516 ccw(c-185.9,95.149) -183.189,94.517 -183.189,94.516 cw(c-182.75,94.415) -182.75,94.865 -102.25,94.865 cw(c-102.25,94.415) -101.811,94.516 cw(c-99.1,95.149) -101.811,94.517 -101.811,94.516 ccw(c-99.1,95.149) -96.389,94.517 cw(c-95.95,94.415) -95.95,94.865 -13.477,94.865 cw(c-13.477,94.415) -13.038,94.516 cw(c-10.327,95.149) -13.038,94.517 -13.038,94.516 ccw(c-10.327,95.149) -7.616,94.517 cw(c-7.177,94.415) -7.164,94.865 cw(c-7.15,94.415) -7.15,94.865 -2.15,94.865 cw(c-2.15,92.415) 0.3,92.415 0.3,39.065 cw(c-0.15,39.065) 0.3,39.062 0.3,2.215 cw(c-2.15,2.215) -2.15,-0.235 -9.15,-0.235 cw(c-9.15,0.215) -9.589,0.113 ccw(c-12.3,-0.52) -15.011,0.113 cw(c-15.45,0.215) -15.889,0.317 cw(c-12.3,-0.52) -8.811,0.665 -2.15,0.665 ccw(c-2.15,2.215) -0.6,2.215 -0.6,39.37 cw(c-0.15,39.37) -0.6,39.373 -0.6,92.415 ccw(c-2.15,92.415) -2.15,93.965 -6.838,93.965 cw(c-10.327,95.149) -13.816,93.965 -95.611,93.965 cw(c-99.1,95.149) -102.589,93.965 -182.411,93.965 cw(c-185.9,95.149) -189.389,93.965 -269.211,93.965 cw(c-272.7,95.149) -276.189,93.965 -282.85,93.965 cw(c-282.85,94.415) -282.851,93.965 cw(c-282.85,92.415) -282.85,93.965 -282.851,93.965 ccw(c-282.85,92.415) -284.4,92.416 cw(c-284.85,92.415) -284.4,92.415 -284.4,39.065 cw(c-284.85,39.065) -284.4,39.063 -284.4,2.215 ccw(c-282.85,2.215)
  pour cut-out: -95.95,-0.235 cw(c-95.95,0.215) -95.95,0.665 -15.45,0.665 cw(c-15.45,0.215) -15,0.215 cw(c-15.45,0.215) -15.45,-0.235
  pour cut-out: -8.758,0.288 ccw(c-12.294,-0.519) -15.841,0.242 ccw(c-15.716,0.215) -15.844,0.215 ccw(c-15.716,0.215) -15.716,0.088 -8.927,0.088 ccw(c-8.927,0.215) -8.817,0.15 ccw(c-8.882,0.26)
  pour cut-out: -95.558,0.288 ccw(c-99.094,-0.519) -102.641,0.242 ccw(c-102.516,0.215) -102.644,0.215 ccw(c-102.516,0.215) -102.516,0.088 -95.727,0.088 ccw(c-95.727,0.215) -95.617,0.15 ccw(c-95.682,0.26)
  pour cut-out: -182.358,0.288 ccw(c-185.894,-0.519) -189.441,0.242 ccw(c-189.316,0.215) -189.444,0.215 ccw(c-189.316,0.215) -189.316,0.088 -182.527,0.088 ccw(c-182.527,0.215) -182.417,0.15 ccw(c-182.482,0.26)
  pour cut-out: -269.158,0.288 ccw(c-272.694,-0.519) -276.241,0.242 ccw(c-276.116,0.215) -276.244,0.215 ccw(c-276.116,0.215) -276.116,0.088 -269.327,0.088 ccw(c-269.327,0.215) -269.217,0.15 ccw(c-269.282,0.26)
  pour cut-out: -276.23,94.342 ccw(c-272.694,95.149) -269.147,94.388 ccw(c-269.272,94.415) -269.144,94.415 ccw(c-269.272,94.415) -269.272,94.542 -276.061,94.542 ccw(c-276.061,94.415) -276.171,94.48 ccw(c-276.106,94.37)
  pour cut-out: -189.43,94.342 ccw(c-185.894,95.149) -182.347,94.388 ccw(c-182.472,94.415) -182.344,94.415 ccw(c-182.472,94.415) -182.472,94.542 -189.261,94.542 ccw(c-189.261,94.415) -189.371,94.48 ccw(c-189.306,94.37)
  pour cut-out: -102.63,94.342 ccw(c-99.094,95.149) -95.547,94.388 ccw(c-95.672,94.415) -95.544,94.415 ccw(c-95.672,94.415) -95.672,94.542 -102.461,94.542 ccw(c-102.461,94.415) -102.571,94.48 ccw(c-102.506,94.37)
  pour cut-out: -13.837,94.342 ccw(c-10.3,95.149) -6.754,94.388 ccw(c-6.878,94.415) -6.751,94.415 ccw(c-6.878,94.415) -6.878,94.542 -13.668,94.542 ccw(c-13.668,94.415) -13.777,94.48 ccw(c-13.713,94.37)
  pour cut-out: -13.837,94.342 ccw(c-10.3,95.149) -6.754,94.388 ccw(c-6.878,94.415) -6.751,94.415 ccw(c-6.878,94.415) -6.878,94.542 -13.668,94.542 ccw(c-13.668,94.415) -13.777,94.48 ccw(c-13.713,94.37)

## Silkscreen, mask and mechanical layers (free items; w line width, h text height)
Top Overlay:
  text "A" at -245.491,78.613 h0.76
  text "C" at -242.951,78.613 h0.76
  text "B" at -240.284,78.613 h0.76
  text "SW" at -243.205,71.755 h0.76
  text "BOOTLEG" at -180.53,14.16 h0.76
  text "RST" at -136.349,5.83 h0.76
  text "REV B2" at -180.276,4.255 h0.76
Top Solder:
  drawing of 2 lines, arcs and shapes, not listed
outline:
  lines w0.1: -284.85,39.065 -284.85,92.415 cw(c-282.85,92.415) -282.85,94.415 -275.85,94.415 ccw(c-272.7,95.149) -269.55,94.415 -189.05,94.415 ccw(c-185.9,95.149) -182.75,94.415 -102.25,94.415 ccw(c-99.1,95.149) -95.95,94.415 -23.553,94.415 ; -284.85,40.767 -284.85,2.215 ccw(c-282.85,2.215) -282.85,0.215 -275.85,0.215 cw(c-272.7,-0.52) -269.55,0.215 -189.05,0.215 cw(c-185.9,-0.52) -182.75,0.215 -102.25,0.215 cw(c-99.1,-0.52) -95.95,0.215 -15.45,0.215 cw(c-12.3,-0.52) -9.15,0.215 -2.15,0.215 ccw(c-2.15,2.215) -0.15,2.215 -0.15,39.37 ; -24.208,94.415 -13.477,94.415 ccw(c-10.327,95.149) -7.177,94.415 ; -7.15,94.415 -2.15,94.415 cw(c-2.15,92.415) -0.15,92.415 -0.15,39.065
Mechanical 2:
  drawing of 444 lines, arcs and shapes, not listed
  text "PROPHET" at -20.347,93.6 h0.5
Mechanical 16:
  drawing of 556 lines, arcs and shapes, not listed

## Dimensions
-0.15,92.415 to -284.85,92.415 on top dimensions
-9.15,0.215 to -7.177,94.415 on top dimensions
-0.15,92.415 to -284.85,92.415 on bot dimensions
-9.15,0.215 to -2.15,94.415 on bot dimensions

## Text inside footprints (layer, text, board x,y; h text height)
D401: Top Overlay "A" at -9.715,45.852 h0.76
S261: Mechanical 16 "7U" at -208.331,7.365 h1.52 r270; Mechanical 16 "6.25U" at -188.764,5.615 h1.52 r270